# EAGLE board CT_schematic (EAGLE 7.6.0)

Size 100 x 80 mm. Coordinates in mm from the lower left corner, seen from the top.
Outline: 0,0 100,0 100,80 0,80 0,0
Copper layers (1*16): Top 0.035mm / dielectric 1.5mm / Bottom 0.035mm
Design rules "default": minimum track width 10mil, minimum drill 24mil, track to track 8mil, track to pad 8mil, pad to pad 8mil, via to via 8mil, smd to smd 8mil, copper to edge 40mil, drill to drill 8mil, minimum pad ring 10mil, minimum via ring 8mil, stop-mask expansion 4mil, vias tented up to drill 0mil, thermal gap 10mil

## Footprints (pad centres in the part's own frame; a part is rotated, then mirrored left to right if it is on the bottom)
C0603 = smd 0.8 x 0.8: 1 -0.762,0; 2 0.762,0
C0402 = smd 0.5 x 0.5: 1 -0.508,0; 2 0.508,0
C0805 = smd 1.2 x 1.3: 1 -1.016,0; 2 1.016,0
C1210 = smd 1.2 x 2.5: 1 -1.524,0; 2 1.524,0
R0603 = smd 0.8 x 0.8: 1 -0.762,0; 2 0.762,0
EXV-9H = smd 3.505 x 1.676: 1 -2.857,0; 2 2.857,0
L0603 = smd 0.8 x 0.8: 1 -0.762,0; 2 0.762,0
PJ-037B_PACKAGE = drill 3.7 square: 1 12,0 | drill 3.2 square: 2 6,0
LQFP176 = smd 0.3 x 1.2: 1 -10.75,-12.75; 2 -10.25,-12.75; 3 -9.75,-12.75; 4 -9.25,-12.75; 5 -8.75,-12.75; 6 -8.25,-12.75; 7 -7.75,-12.75; 8 -7.25,-12.75; 9 -6.75,-12.75; 10 -6.25,-12.75; 11 -5.75,-12.75; 12 -5.25,-12.75; 13 -4.75,-12.75; 14 -4.25,-12.75; 15 -3.75,-12.75; 16 -3.25,-12.75; 17 -2.75,-12.75; 18 -2.25,-12.75; 19 -1.75,-12.75; 20 -1.25,-12.75; 21 -0.75,-12.75; 22 -0.25,-12.75; 23 0.25,-12.75; 24 0.75,-12.75; 25 1.25,-12.75; 26 1.75,-12.75; 27 2.25,-12.75; 28 2.75,-12.75; 29 3.25,-12.75; 30 3.75,-12.75; 31 4.25,-12.75; 32 4.75,-12.75; 33 5.25,-12.75; 34 5.75,-12.75; 35 6.25,-12.75; 36 6.75,-12.75; 37 7.25,-12.75; 38 7.75,-12.75; 39 8.25,-12.75; 40 8.75,-12.75; 41 9.25,-12.75; 42 9.75,-12.75; 43 10.25,-12.75; 44 10.75,-12.75; 89 10.75,12.75; 90 10.25,12.75; 91 9.75,12.75; 92 9.25,12.75; 93 8.75,12.75; 94 8.25,12.75; 95 7.75,12.75; 96 7.25,12.75; 97 6.75,12.75; 98 6.25,12.75; 99 5.75,12.75; 100 5.25,12.75; 101 4.75,12.75; 102 4.25,12.75; 103 3.75,12.75; 104 3.25,12.75; 105 2.75,12.75; 106 2.25,12.75; 107 1.75,12.75; 108 1.25,12.75; 109 0.75,12.75; 110 0.25,12.75; 111 -0.25,12.75; 112 -0.75,12.75; 113 -1.25,12.75; 114 -1.75,12.75; 115 -2.25,12.75; 116 -2.75,12.75; 117 -3.25,12.75; 118 -3.75,12.75; 119 -4.25,12.75; 120 -4.75,12.75; 121 -5.25,12.75; 122 -5.75,12.75; 123 -6.25,12.75; 124 -6.75,12.75; 125 -7.25,12.75; 126 -7.75,12.75; 127 -8.25,12.75; 128 -8.75,12.75; 129 -9.25,12.75; 130 -9.75,12.75; 131 -10.25,12.75; 132 -10.75,12.75 | smd 1.2 x 0.3: 45 12.75,-10.75; 46 12.75,-10.25; 47 12.75,-9.75; 48 12.75,-9.25; 49 12.75,-8.75; 50 12.75,-8.25; 51 12.75,-7.75; 52 12.75,-7.25; 53 12.75,-6.75; 54 12.75,-6.25; 55 12.75,-5.75; 56 12.75,-5.25; 57 12.75,-4.75; 58 12.75,-4.25; 59 12.75,-3.75; 60 12.75,-3.25; 61 12.75,-2.75; 62 12.75,-2.25; 63 12.75,-1.75; 64 12.75,-1.25; 65 12.75,-0.75; 66 12.75,-0.25; 67 12.75,0.25; 68 12.75,0.75; 69 12.75,1.25; 70 12.75,1.75; 71 12.75,2.25; 72 12.75,2.75; 73 12.75,3.25; 74 12.75,3.75; 75 12.75,4.25; 76 12.75,4.75; 77 12.75,5.25; 78 12.75,5.75; 79 12.75,6.25; 80 12.75,6.75; 81 12.75,7.25; 82 12.75,7.75; 83 12.75,8.25; 84 12.75,8.75; 85 12.75,9.25; 86 12.75,9.75; 87 12.75,10.25; 88 12.75,10.75; 133 -12.75,10.75; 134 -12.75,10.25; 135 -12.75,9.75; 136 -12.75,9.25; 137 -12.75,8.75; 138 -12.75,8.25; 139 -12.75,7.75; 140 -12.75,7.25; 141 -12.75,6.75; 142 -12.75,6.25; 143 -12.75,5.75; 144 -12.75,5.25; 145 -12.75,4.75; 146 -12.75,4.25; 147 -12.75,3.75; 148 -12.75,3.25; 149 -12.75,2.75; 150 -12.75,2.25; 151 -12.75,1.75; 152 -12.75,1.25; 153 -12.75,0.75; 154 -12.75,0.25; 155 -12.75,-0.25; 156 -12.75,-0.75; 157 -12.75,-1.25; 158 -12.75,-1.75; 159 -12.75,-2.25; 160 -12.75,-2.75; 161 -12.75,-3.25; 162 -12.75,-3.75; 163 -12.75,-4.25; 164 -12.75,-4.75; 165 -12.75,-5.25; 166 -12.75,-5.75; 167 -12.75,-6.25; 168 -12.75,-6.75; 169 -12.75,-7.25; 170 -12.75,-7.75; 171 -12.75,-8.25; 172 -12.75,-8.75; 173 -12.75,-9.25; 174 -12.75,-9.75; 175 -12.75,-10.25; 176 -12.75,-10.75
SAMTEC_FTSH-105-01-L-DV-K = smd 0.762 x 2.794: 1 -2.54,-2.032; 2 -2.54,2.032; 3 -1.27,-2.032; 4 -1.27,2.032; 5 0,-2.032; 6 0,2.032; 7 1.27,-2.032; 8 1.27,2.032; 9 2.54,-2.032; 10 2.54,2.032
QFN-32 = smd 0.6 x 0.3: 1 -2.3,1.75; 2 -2.3,1.25; 3 -2.3,0.75; 4 -2.3,0.25; 5 -2.3,-0.25; 6 -2.3,-0.75; 7 -2.3,-1.25; 8 -2.3,-1.75; 17 2.3,-1.75; 18 2.3,-1.25; 19 2.3,-0.75; 20 2.3,-0.25; 21 2.3,0.25; 22 2.3,0.75; 23 2.3,1.25; 24 2.3,1.75 | smd 0.3 x 0.6: 9 -1.75,-2.3; 10 -1.25,-2.3; 11 -0.75,-2.3; 12 -0.25,-2.3; 13 0.25,-2.3; 14 0.75,-2.3; 15 1.25,-2.3; 16 1.75,-2.3; 25 1.75,2.3; 26 1.25,2.3; 27 0.75,2.3; 28 0.25,2.3; 29 -0.25,2.3; 30 -0.75,2.3; 31 -1.25,2.3; 32 -1.75,2.3 | smd 3.2 x 3.2: EXP 0,0
7498011122R = smd 0.71 x 2.29: 1 -3.545,-3.18; 2 -2.525,-3.18; 3 -1.505,-3.18; 4 -0.485,-3.18; 5 0.535,-3.18; 6 1.555,-3.18; 8 3.595,-3.18; 9 5.635,-3.18; 10 6.655,-3.18; 11 -6.605,-3.18; 12 -5.585,-3.18 | smd 1.4 x 2.54: 13 -8.51,10.2; 14 8.51,10.2 | hole 1.4: -3.5,0; 3.5,0
TDFN-8/6MM = smd 0.3 x 0.75: 1 0,0; 2 0.5,0; 3 1,0; 4 1.5,0; 5 1.5,3; 6 1,3; 7 0.5,3; 8 0,3
MOLEX_47219-2001 = smd 0.8 x 1.5: 1 3.2,-2.1; 2 2.1,-2.1; 3 1,-2.1; 4 -0.1,-2.1; 5 -1.2,-2.1; 6 -2.3,-2.1; 7 -3.4,-2.1; 8 -4.5,-2.1 | smd 1.5 x 2.05: G1 6.875,-4.7; G2 6.875,3.6; G3 -6.875,3.6; G4 -6.875,-4.7
LBGA-64 = smd 0.559 x 0.559: A1 -3.5,3.5; A2 -2.5,3.5; A3 -1.5,3.5; A4 -0.5,3.5; A5 0.5,3.5; A6 1.5,3.5; A7 2.5,3.5; A8 3.5,3.5; B1 -3.5,2.5; B2 -2.5,2.5; B3 -1.5,2.5; B4 -0.5,2.5; B5 0.5,2.5; B6 1.5,2.5; B7 2.5,2.5; B8 3.5,2.5; C1 -3.5,1.5; C2 -2.5,1.5; C3 -1.5,1.5; C4 -0.5,1.5; C5 0.5,1.5; C6 1.5,1.5; C7 2.5,1.5; C8 3.5,1.5; D1 -3.5,0.5; D2 -2.5,0.5; D3 -1.5,0.5; D4 -0.5,0.5; D5 0.5,0.5; D6 1.5,0.5; D7 2.5,0.5; D8 3.5,0.5; E1 -3.5,-0.5; E2 -2.5,-0.5; E3 -1.5,-0.5; E4 -0.5,-0.5; E5 0.5,-0.5; E6 1.5,-0.5; E7 2.5,-0.5; E8 3.5,-0.5; F1 -3.5,-1.5; F2 -2.5,-1.5; F3 -1.5,-1.5; F4 -0.5,-1.5; F5 0.5,-1.5; F6 1.5,-1.5; F7 2.5,-1.5; F8 3.5,-1.5; G1 -3.5,-2.5; G2 -2.5,-2.5; G3 -1.5,-2.5; G4 -0.5,-2.5; G5 0.5,-2.5; G6 1.5,-2.5; G7 2.5,-2.5; G8 3.5,-2.5; H1 -3.5,-3.5; H2 -2.5,-3.5; H3 -1.5,-3.5; H4 -0.5,-3.5; H5 0.5,-3.5; H6 1.5,-3.5; H7 2.5,-3.5; H8 3.5,-3.5
ABS07-32.768KHZ-7-T = smd 1.1 x 2.4: 1 -2.5,0; 2 0,0
ABLS-25.000MHZ-B2F-T = smd 5.6 x 2.8: 1 -3.81,0; 2 5.69,0
ASFL1 = smd 1.7 x 1.5: 1 -1.27,-1.1; 2 1.27,-1.1; 3 1.27,1.1; 4 -1.27,1.1
WSON-8 = smd 0.3 x 0.6: 1 -0.75,0; 2 0.05,0; 3 0.85,0; 4 1.65,0; 5 1.65,3.8; 6 0.85,3.8; 7 0.05,3.8; 8 -0.75,3.8 | smd 3 x 2.6: PAD 0.45,1.9
QFN-38_UHF = smd 0.75 x 0.3: 1 -2.4,2.75; 2 -2.4,2.25; 3 -2.4,1.75; 4 -2.4,1.25; 6 -2.4,0.25; 7 -2.4,-0.25; 8 -2.4,-0.75; 9 -2.4,-1.25; 10 -2.4,-1.75; 11 -2.4,-2.25; 12 -2.4,-2.75; 20 2.4,-2.75; 21 2.4,-2.25; 22 2.4,-1.75; 23 2.4,-1.25; 24 2.4,-0.75; 25 2.4,-0.25; 26 2.4,0.25; 27 2.4,0.75; 28 2.4,1.25; 29 2.4,1.75; 30 2.4,2.25; 31 2.4,2.75 | smd 0.758 x 0.3: 5 -2.4,0.75 | smd 0.3 x 0.75: 13 -1.5,-3.4; 14 -1,-3.4; 15 -0.5,-3.4; 16 0,-3.4; 17 0.5,-3.4; 18 1,-3.4; 19 1.5,-3.4; 32 1.5,3.4; 33 1,3.4; 34 0.5,3.4; 35 0,3.4; 36 -0.5,3.4; 37 -1,3.4; 38 -1.5,3.4 | smd 3.2 x 5.2: 39 0,0
IRF8306MTRPBF = smd 0.9 x 1.85: 1 0,0; 2 0,-2.35; 6 6.4,0; 7 6.4,-2.35 | smd 0.75 x 0.75: 3 1.75,-1.175 | smd 1.45 x 0.87: 4 3.5,-0.565; 5 3.5,-1.785
SW_4-1437565-2 = smd 1.4 x 2.1: 1 -2.23,4.55; 2 -2.23,-4.55; 3 2.23,4.55; 4 2.23,-4.55
LGM67K-G1J2-24-Z = smd 0.8 x 1.4: A -2,0; C 0,0
NC7SZ125M5X = smd 1.3 x 0.7: 1 -1.3,0.95; 2 -1.3,0; 3 -1.3,-0.95; 4 1.3,-0.95; 5 1.3,0.95

## Placement (x,y rotation side)
C1  1e-06  [C0603]  -96.52,85.09 0 top  (outside the outline)
C2  1e-07  [C0603]  -15.24,90.17 0 top  (outside the outline)
C3  1e-07  [C0603]  -19.05,90.17 0 top  (outside the outline)
C4  1e-07  [C0603]  -22.86,90.17 0 top  (outside the outline)
C5  1e-07  [C0603]  -26.67,90.17 0 top  (outside the outline)
C6  1e-07  [C0603]  -30.48,90.17 0 top  (outside the outline)
C7  1e-07  [C0603]  -34.29,90.17 0 top  (outside the outline)
C8  1e-07  [C0603]  -38.1,90.17 0 top  (outside the outline)
C9  1e-07  [C0603]  -41.91,90.17 0 top  (outside the outline)
C10  1e-07  [C0603]  -45.72,90.17 0 top  (outside the outline)
C11  1e-07  [C0603]  -49.53,90.17 0 top  (outside the outline)
C12  1e-07  [C0603]  -53.34,90.17 0 top  (outside the outline)
C13  1e-07  [C0603]  -57.15,90.17 0 top  (outside the outline)
C14  1e-07  [C0603]  -60.96,90.17 0 top  (outside the outline)
C15  1e-07  [C0603]  -64.77,90.17 0 top  (outside the outline)
C16  1e-07  [C0603]  -68.58,90.17 0 top  (outside the outline)
C17  1e-07  [C0603]  -72.39,90.17 0 top  (outside the outline)
C18  4.7e-06  [C0603]  -85.09,85.09 0 top  (outside the outline)
C19  1e-08  [C0603]  -76.2,90.17 0 top  (outside the outline)
C20  1e-06  [C0603]  -80.01,90.17 0 top  (outside the outline)
C21  1e-07  [C0402]  -46.99,100.33 0 top  (outside the outline)
C22  1e-07  [C0402]  -50.8,100.33 0 top  (outside the outline)
C23  1e-11  [C0402]  -54.61,100.33 0 top  (outside the outline)
C24  1e-11  [C0402]  -58.42,100.33 0 top  (outside the outline)
C25  1e-11  [C0402]  -62.23,100.33 0 top  (outside the outline)
C26  1e-11  [C0402]  -66.04,100.33 0 top  (outside the outline)
C27  1e-07  [C0402]  -69.85,100.33 0 top  (outside the outline)
C28  1e-07  [C0402]  -73.66,100.33 0 top  (outside the outline)
C29  1e-07  [C0402]  -77.47,100.33 0 top  (outside the outline)
C30  2.2e-06  [C0603]  -88.9,85.09 0 top  (outside the outline)
C31  1e-07  [C0402]  -81.28,100.33 0 top  (outside the outline)
C32  1e-07  [C0402]  -85.09,100.33 0 top  (outside the outline)
C33  1e-05  [C0805]  -53.34,73.66 0 top  (outside the outline)
C34  1e-07  [C0402]  -88.9,100.33 0 top  (outside the outline)
C35  2.2e-11  [C0402]  -39.37,100.33 0 top  (outside the outline)
C36  2.2e-11  [C0402]  -43.18,100.33 0 top  (outside the outline)
C37  1e-08  [C0402]  -92.71,100.33 0 top  (outside the outline)
C38  1e-07  [C0402]  -96.52,100.33 0 top  (outside the outline)
C39  1e-05  [C0805]  -58.42,73.66 0 top  (outside the outline)
C40  1e-08  [C0402]  -15.24,105.41 0 top  (outside the outline)
C41  1e-08  [C0402]  -19.05,105.41 0 top  (outside the outline)
C42  1e-08  [C0402]  -22.86,105.41 0 top  (outside the outline)
C43  1e-08  [C0402]  -26.67,105.41 0 top  (outside the outline)
C44  1e-05  [C1210]  -90.17,67.31 0 top  (outside the outline)
C45  1e-05  [C0805]  -63.5,73.66 0 top  (outside the outline)
C46  1e-08  [C0402]  -30.48,105.41 0 top  (outside the outline)
C47  1e-05  [C1210]  -96.52,67.31 0 top  (outside the outline)
C48  1e-05  [C1210]  -16.51,73.66 0 top  (outside the outline)
C49  1e-08  [C0402]  -34.29,105.41 0 top  (outside the outline)
C50  1e-05  [C1210]  -22.86,73.66 0 top  (outside the outline)
C51  1e-05  [C0805]  -68.58,73.66 0 top  (outside the outline)
C52  1e-07  [C0402]  -38.1,105.41 0 top  (outside the outline)
C53  2.2e-06  [C0603]  -92.71,85.09 0 top  (outside the outline)
C54  2.45e-08  [R0603]  -55.88,80.01 0 top  (outside the outline)
C55  2.8258362168397e-09  [R0603]  -78.74,73.66 0 top  (outside the outline)
C56  7.105e-09  [R0603]  -91.44,73.66 0 top  (outside the outline)
C57  0.0001  [EXV-9H]  -64.77,58.42 0 top  (outside the outline)
C58  0.0001  [EXV-9H]  -76.2,58.42 0 top  (outside the outline)
C59  1e-08  [C0402]  -41.91,105.41 0 top  (outside the outline)
C60  1e-08  [C0402]  -45.72,105.41 0 top  (outside the outline)
C61  1e-08  [C0402]  -49.53,105.41 0 top  (outside the outline)
C62  1e-08  [C0402]  -53.34,105.41 0 top  (outside the outline)
F1  240.0  [L0603]  -83.82,90.17 0 top  (outside the outline)
I1  97.0  [R0603]  -87.63,90.17 0 top  (outside the outline)
J1  PJ-037B  [PJ-037B_PACKAGE]  -57.15,35.56 0 top  (outside the outline)
R2  1000.0  [R0603]  -91.44,90.17 0 top  (outside the outline)
R7  4700.0  [R0603]  -95.25,90.17 0 top  (outside the outline)
R8  4700.0  [R0603]  -15.24,95.25 0 top  (outside the outline)
R9  4700.0  [R0603]  -19.05,95.25 0 top  (outside the outline)
R10  2200.0  [R0603]  -22.86,95.25 0 top  (outside the outline)
R12  2200.0  [R0603]  -26.67,95.25 0 top  (outside the outline)
R14  2200.0  [R0603]  -30.48,95.25 0 top  (outside the outline)
R16  2200.0  [R0603]  -34.29,95.25 0 top  (outside the outline)
R18  10000.0  [R0603]  -60.96,80.01 0 top  (outside the outline)
R19  10000.0  [R0603]  -66.04,80.01 0 top  (outside the outline)
R20  10000.0  [R0603]  -71.12,80.01 0 top  (outside the outline)
R21  10000.0  [R0603]  -76.2,80.01 0 top  (outside the outline)
R22  10000.0  [R0603]  -81.28,80.01 0 top  (outside the outline)
R23  10000.0  [R0603]  -86.36,80.01 0 top  (outside the outline)
R24  10000.0  [R0603]  -91.44,80.01 0 top  (outside the outline)
R25  10000.0  [R0603]  -96.52,80.01 0 top  (outside the outline)
R26  5.0  [R0603]  -38.1,95.25 0 top  (outside the outline)
R27  0.1  [R0603]  -41.91,95.25 0 top  (outside the outline)
R28  0.1  [R0603]  -45.72,95.25 0 top  (outside the outline)
R29  200.0  [R0603]  -49.53,95.25 0 top  (outside the outline)
R30  220.0  [R0603]  -53.34,95.25 0 top  (outside the outline)
R31  6490.0  [R0603]  -57.15,95.25 0 top  (outside the outline)
R32  4700.0  [R0603]  -60.96,95.25 0 top  (outside the outline)
R33  4700.0  [R0603]  -64.77,95.25 0 top  (outside the outline)
R34  4700.0  [R0603]  -68.58,95.25 0 top  (outside the outline)
R35  4700.0  [R0603]  -72.39,95.25 0 top  (outside the outline)
R36  1000.0  [R0603]  -76.2,95.25 0 top  (outside the outline)
R37  4700.0  [R0603]  -80.01,95.25 0 top  (outside the outline)
R38  1000.0  [R0603]  -83.82,95.25 0 top  (outside the outline)
R39  1000.0  [R0603]  -87.63,95.25 0 top  (outside the outline)
R40  1000.0  [R0603]  -91.44,95.25 0 top  (outside the outline)
R41  4700.0  [R0603]  -95.25,95.25 0 top  (outside the outline)
R42  100000.0  [R0603]  -96.52,73.66 0 top  (outside the outline)
R43  100000.0  [R0603]  -15.24,80.01 0 top  (outside the outline)
R44  100000.0  [R0603]  -20.32,80.01 0 top  (outside the outline)
R45  100000.0  [R0603]  -25.4,80.01 0 top  (outside the outline)
R46  100000.0  [R0603]  -30.48,80.01 0 top  (outside the outline)
R47  100000.0  [R0603]  -35.56,80.01 0 top  (outside the outline)
R48  10000.0  [R0603]  -15.24,85.09 0 top  (outside the outline)
R49  10000.0  [R0603]  -20.32,85.09 0 top  (outside the outline)
R50  10000.0  [R0603]  -25.4,85.09 0 top  (outside the outline)
R51  10000.0  [R0603]  -30.48,85.09 0 top  (outside the outline)
R52  10000.0  [R0603]  -35.56,85.09 0 top  (outside the outline)
R53  100000.0  [R0603]  -40.64,80.01 0 top  (outside the outline)
R54  200.0  [R0603]  -15.24,100.33 0 top  (outside the outline)
R55  1000.0  [R0603]  -19.05,100.33 0 top  (outside the outline)
R56  100000.0  [R0603]  -45.72,80.01 0 top  (outside the outline)
R57  2231.0  [R0603]  -22.86,100.33 0 top  (outside the outline)
R58  1000.0  [R0603]  -26.67,100.33 0 top  (outside the outline)
R59  100000.0  [R0603]  -50.8,80.01 0 top  (outside the outline)
R60  200.0  [R0603]  -30.48,100.33 0 top  (outside the outline)
R61  1000.0  [R0603]  -34.29,100.33 0 top  (outside the outline)
R62  10000.0  [R0603]  -40.64,85.09 0 top  (outside the outline)
R63  75000.0  [R0603]  -45.72,85.09 0 top  (outside the outline)
R64  10000.0  [R0603]  -50.8,85.09 0 top  (outside the outline)
R65  10000.0  [R0603]  -55.88,85.09 0 top  (outside the outline)
R66  95300.0  [R0603]  -60.96,85.09 0 top  (outside the outline)
R67  95300.0  [R0603]  -66.04,85.09 0 top  (outside the outline)
R68  10000.0  [R0603]  -71.12,85.09 0 top  (outside the outline)
R69  10000.0  [R0603]  -76.2,85.09 0 top  (outside the outline)
R70  10000.0  [R0603]  -81.28,85.09 0 top  (outside the outline)
R71  104236.36363636  [R0603]  -86.36,73.66 0 top  (outside the outline)
U1  STM32F427IGT6  [LQFP176]  -45.72,13.97 0 top  (outside the outline)
U2  FTSH-105-01-L-DV-K  [SAMTEC_FTSH-105-01-L-DV-K]  -35.56,36.83 0 top  (outside the outline)
U3  KSZ8081RNBIA-TR  [QFN-32]  -90.17,34.29 0 top  (outside the outline)
U4  7498011122R  [7498011122R]  -22.86,7.62 0 top  (outside the outline)
U5  24AA02T-I/MNY  [TDFN-8/6MM]  -24.13,48.26 0 top  (outside the outline)
U6  0472192001  [MOLEX_47219-2001]  -69.85,8.89 0 top  (outside the outline)
U7  mt28ew256aba1HPC-0SIT  [LBGA-64]  -86.36,7.62 0 top  (outside the outline)
U8  ABS07-32.768KHZ-7-T  [ABS07-32.768KHZ-7-T]  -69.85,67.31 0 top  (outside the outline)
U9  ABLS-25.000MHZ-B2F-T  [ABLS-25.000MHZ-B2F-T]  -26.67,67.31 0 top  (outside the outline)
U10  ABLS-25.000MHZ-B2F-T  [ABLS-25.000MHZ-B2F-T]  -46.99,67.31 0 top  (outside the outline)
U11  ASFL1-50MHZ-NCS  [ASFL1]  -46.99,58.42 0 top  (outside the outline)
U12  LP3878SDX-ADJ/NOPB  [WSON-8]  -74.93,46.99 0 top  (outside the outline)
U13  LP3878SDX-ADJ/NOPB  [WSON-8]  -95.25,46.99 0 top  (outside the outline)
U14  LP3878SDX-ADJ/NOPB  [WSON-8]  -30.48,57.15 0 top  (outside the outline)
U15  LTC2928CUHF#PBF  [QFN-38_UHF]  -54.61,58.42 0 top  (outside the outline)
U16  IRF8306MTRPbF  [IRF8306MTRPBF]  -40.64,49.53 0 top  (outside the outline)
U17  IRF8306MTRPbF  [IRF8306MTRPBF]  -55.88,49.53 0 top  (outside the outline)
U18  4-1437565-2  [SW_4-1437565-2]  -73.66,34.29 0 top  (outside the outline)
U19  Q65110A2395  [LGM67K-G1J2-24-Z]  -78.74,67.31 0 top  (outside the outline)
U20  nc7sz125m5x  [NC7SZ125M5X]  -27.94,73.66 0 top  (outside the outline)
U21  nc7sz125m5x  [NC7SZ125M5X]  -34.29,73.66 0 top  (outside the outline)
U22  nc7sz125m5x  [NC7SZ125M5X]  -40.64,73.66 0 top  (outside the outline)
U23  nc7sz125m5x  [NC7SZ125M5X]  -46.99,73.66 0 top  (outside the outline)

## Library data of the parts
C1-C62 F1 I1 J1 R2 R7-R10 R12 R14 R16 R18-R71 U1-U23 = circuit_tree

## Nets
CLK_CRYSTAL_U1_9: C23.1 U1.9 U8.1
CLK_CRYSTAL_U1_10: C24.1 U1.10 U8.2
CLK_CRYSTAL_U1_29: C25.1 U1.29 U9.1
CLK_CRYSTAL_U1_30: C26.1 U1.30 U9.2
CLK_CRYSTAL_U3_8: C35.1 U3.8 U10.2
CLK_CRYSTAL_U3_9: C36.1 U3.9 U10.1
CLK_U1_41: U1.41 U11.3
GND: C1.2 C2.2 C3.2 C4.2 C5.2 C6.2 C7.2 C8.2 C9.2 C10.2 C11.2 C12.2 C13.2 C14.2 C15.2 C16.2 C17.2 C18.2 C19.2 C20.2 C21.2 C22.2 C23.2 C24.2 C25.2 C26.2 C27.2 C28.2 C29.2 C30.2 C31.2 C32.2 C33.2 C34.2 C35.2 C36.2 C37.2 C38.2 C39.2 C40.2 C41.2 C42.2 C43.2 C44.2 C45.2 C46.2 C47.2 C48.2 C49.2 C50.2 C51.2 C52.2 C53.2 C54.2 C55.2 C56.2 C57.2 C58.2 C59.2 C60.2 C61.2 C62.2 J1.2 R2.2 R20.2 R25.2 R26.2 R27.2 R28.2 R31.2 R33.2 R36.2 R38.2 R39.2 R40.2 R55.2 R58.2 R61.2 R63.2 R66.2 R67.2 R68.2 R69.2 R70.2 U1.14 U1.22 U1.37 U1.61 U1.71 U1.90 U1.102 U1.113 U1.126 U1.135 U1.148 U1.158 U2.3 U2.5 U3.1 U3.EXP U4.1 U4.10 U5.4 U5.7 U6.6 U6.G1 U6.G2 U6.G3 U6.G4 U7.E8 U7.H2 U7.H7 U11.2 U12.3 U12.PAD U13.3 U13.PAD U14.3 U14.PAD U15.8 U15.9 U15.10 U15.12 U15.13 U15.24 U15.25 U15.30 U15.32 U15.39 U19.C U20.2 U20.3 U21.1 U21.3 U22.1 U22.3 U23.1 U23.3
NET_U1_31: R9.1 U1.31 U23.4
NET_U1_33: R14.1 U1.33 U3.12
NET_U1_39: C19.1 C20.1 F1.1 U1.38 U1.39
NET_U1_42: R16.1 U1.42 U3.11
NET_U1_48: R21.1 U1.48
NET_U1_58: R20.1 U1.58
NET_U1_125: C22.1 U1.125
NET_U1_164: R10.1 U1.164 U5.6
NET_U1_165: R12.1 U1.165 U5.5
NET_U1_166: R19.1 U1.166
NET_U1_171: R18.1 U1.171
NET_U1_175: U19.A
NET_U1_176: U18.3 U18.4
NET_U2_9: R26.1 U2.9
NET_U3_2: C30.1 C31.1 U3.2
NET_U3_3: C32.1 I1.1 U3.3
NET_U3_10: R31.1 U3.10
NET_U3_13: R34.1 U3.13
NET_U3_14: R35.1 U3.14
NET_U3_19: R33.1 U3.19
NET_U3_20: R39.1 U3.20
NET_U3_21: R32.1 U3.21
NET_U3_28: R37.1 U3.28
NET_U3_29: R38.1 U3.29
NET_U3_31: R40.1 U3.31
NET_U3_32: R7.1 U3.32 U21.4
NET_U4_1: U3.7 U4.1
NET_U4_2: C28.1 U4.2
NET_U4_3: U3.6 U4.3
NET_U4_4: U3.5 U4.4
NET_U4_5: C29.1 U4.5
NET_U4_6: U3.4 U4.6
NET_U4_8: R28.1 U4.8
NET_U4_9: R29.1 U4.9
NET_U4_12: R30.1 U4.12
NET_U4_13: R27.1 U4.13 U4.14
NET_U4_30: R29.2
NET_U4_31: R30.2
NET_U7_B4: R51.1 U7.B4
NET_U7_B5: R8.1 U7.B5 U22.4
NET_U12_1: C43.1 U12.1
NET_U12_6: R54.2 R55.1 U12.6
NET_U12_8: R53.1 U12.8
NET_U13_1: C46.1 U13.1
NET_U13_6: R57.2 R58.1 U13.6
NET_U13_8: R56.1 U13.8
NET_U14_1: C49.1 U14.1
NET_U14_6: R60.2 R61.1 U14.6
NET_U14_8: R59.1 U14.8
NET_U15_3: R69.1 U15.3
NET_U15_6: R66.1 U15.6
NET_U15_7: R67.1 U15.7
NET_U15_16: R68.1 R71.1 U15.16
NET_U15_18: R65.1 U15.18
NET_U15_19: R64.1 U15.19 U15.20
NET_U15_21: R62.1 R63.1 U15.21 U20.4 U21.2 U22.2 U23.2
NET_U15_22: C52.1 R62.2 R64.2 R65.2 U15.11 U15.22
NET_U15_26: C55.1 U15.26
NET_U15_27: C54.1 U15.27
NET_U15_28: C56.1 U15.28
NET_U15_38: R70.1 U15.38
NET_U16_3: U15.2 U16.3
NET_U17_3: U15.37 U17.3
NET_U18_1: R2.1 U18.1 U18.2
PROC_ETH_CRS_DV: U1.53 U3.18
PROC_ETH_RXD0: R41.1 U1.54 U3.16
PROC_ETH_RXD1: R36.1 U1.55 U3.15
PROC_ETH_TX_EN: U1.80 U3.23
PROC_ETH_TXD0: U1.92 U3.24
PROC_ETH_TXD1: U1.93 U3.25
PROC_FMC_A0: U1.16 U7.E2
PROC_FMC_A1: U1.17 U7.D2
PROC_FMC_A2: U1.18 U7.C2
PROC_FMC_A3: U1.19 U7.A2
PROC_FMC_A4: U1.20 U7.B2
PROC_FMC_A5: U1.21 U7.D3
PROC_FMC_A6: U1.60 U7.C3
PROC_FMC_A7: U1.63 U7.A3
PROC_FMC_A8: U1.64 U7.B6
PROC_FMC_A9: U1.65 U7.A6
PROC_FMC_A10: U1.66 U7.C6
PROC_FMC_A11: U1.67 U7.D6
PROC_FMC_A12: U1.106 U7.B7
PROC_FMC_A13: U1.107 U7.A7
PROC_FMC_A14: U1.108 U7.C7
PROC_FMC_A15: U1.109 U7.D7
PROC_FMC_A16: U1.99 U7.E7
PROC_FMC_A17: U1.100 U7.B3
PROC_FMC_A18: U1.101 U7.C4
PROC_FMC_A19: U1.2 U7.D5
PROC_FMC_A20: U1.3 U7.D4
PROC_FMC_A21: U1.4 U7.C5
PROC_FMC_A22: U1.5 U7.B8
PROC_FMC_A23: U1.1 U7.C8
PROC_FMC_D0: U1.104 U7.E3
PROC_FMC_D1: U1.105 U7.H3
PROC_FMC_D2: U1.142 U7.E4
PROC_FMC_D3: U1.143 U7.H4
PROC_FMC_D4: U1.68 U7.H5
PROC_FMC_D5: U1.69 U7.E5
PROC_FMC_D6: U1.70 U7.H6
PROC_FMC_D7: U1.73 U7.E6
PROC_FMC_D8: U1.74 U7.F3
PROC_FMC_D9: U1.75 U7.G3
PROC_FMC_D10: U1.76 U7.F4
PROC_FMC_D11: U1.77 U7.G4
PROC_FMC_D12: U1.78 U7.F5
PROC_FMC_D13: U1.96 U7.G6
PROC_FMC_D14: U1.97 U7.F6
PROC_FMC_D15: U1.98 U7.G7
PROC_FMC_NBL0: R52.1 U1.169 U7.F7
PROC_FMC_NE2: R48.1 U1.152 U7.F2
PROC_FMC_NOE: R49.1 U1.146 U7.G2
PROC_FMC_NWAIT: U1.150 U7.A4
PROC_FMC_NWE: R50.1 U1.147 U7.A5
PROC_SDIO_CK: R43.1 U1.141 U6.5
PROC_SDIO_CMD: R42.1 U1.144 U6.3
PROC_SDIO_D0: R44.1 U1.117 U6.7
PROC_SDIO_D1: R45.1 U1.118 U6.8
PROC_SDIO_D2: R46.1 U1.139 U6.1
PROC_SDIO_D3: R47.1 U1.140 U6.2
PROC_SYS_JTCK_SWCLK: R25.1 U1.137 U2.4
PROC_SYS_JTDI: R23.1 U1.138 U2.8
PROC_SYS_JTDO_SWO: U1.161 U2.6
PROC_SYS_JTMS_SWDIO: R24.1 U1.124 U2.2
RST_OUT_U2_JTAG_RST_B: R22.1 U2.10 U20.1
VCC_12V8: C53.1 C57.1 C58.1 J1.1 R71.2 U15.23 U16.1 U16.2 U16.6 U16.7 U17.1 U17.2 U17.6 U17.7
VCC_S1_12V8: C44.1 C47.1 R53.2 R56.2 U12.4 U13.4 U16.4 U16.5
VCC_S2_12V8: C50.1 R59.2 U14.4 U17.4 U17.5
VCC_TIER1_1V2: C21.1 C45.1 R54.1 U1.81 U12.5
VCC_TIER1_3V3: C1.1 C2.1 C3.1 C4.1 C5.1 C6.1 C7.1 C8.1 C9.1 C10.1 C11.1 C12.1 C13.1 C14.1 C15.1 C16.1 C17.1 C18.1 C27.1 C33.1 C34.1 C37.1 C38.1 C39.1 C40.1 C41.1 C42.1 C48.1 C59.1 C60.1 C61.1 C62.1 F1.2 I1.2 R7.2 R8.2 R9.2 R10.2 R12.2 R14.2 R16.2 R18.2 R19.2 R21.2 R22.2 R23.2 R24.2 R32.2 R34.2 R35.2 R37.2 R41.2 R42.2 R43.2 R44.2 R45.2 R46.2 R47.2 R48.2 R49.2 R50.2 R51.2 R52.2 R57.1 U1.6 U1.15 U1.23 U1.36 U1.49 U1.62 U1.72 U1.82 U1.91 U1.103 U1.114 U1.127 U1.136 U1.149 U1.159 U1.172 U2.1 U3.17 U5.8 U6.4 U7.D8 U7.F1 U7.G5 U11.4 U13.5 U20.5 U21.5 U22.5 U23.5
VCC_TIER2_1V2: C51.1 R60.1 U14.5

## Tracks (layer width: path | path; a pad name or v marks a point on that pad's centre or on a via)
CLK_CRYSTAL_U1_9  (2 unrouted)
CLK_CRYSTAL_U1_10  (2 unrouted)
CLK_CRYSTAL_U1_29  (2 unrouted)
CLK_CRYSTAL_U1_30  (2 unrouted)
CLK_CRYSTAL_U3_8  (2 unrouted)
CLK_CRYSTAL_U3_9  (2 unrouted)
CLK_U1_41  (1 unrouted)
GND  (137 unrouted)
NET_U1_31  (2 unrouted)
NET_U1_33  (2 unrouted)
NET_U1_39  (4 unrouted)
NET_U1_42  (2 unrouted)
NET_U1_48  (1 unrouted)
NET_U1_58  (1 unrouted)
NET_U1_125  (1 unrouted)
NET_U1_164  (2 unrouted)
NET_U1_165  (2 unrouted)
NET_U1_166  (1 unrouted)
NET_U1_171  (1 unrouted)
NET_U1_176  (1 unrouted)
NET_U2_9  (1 unrouted)
NET_U3_2  (2 unrouted)
NET_U3_3  (2 unrouted)
NET_U3_10  (1 unrouted)
NET_U3_13  (1 unrouted)
NET_U3_14  (1 unrouted)
NET_U3_19  (1 unrouted)
NET_U3_20  (1 unrouted)
NET_U3_21  (1 unrouted)
NET_U3_28  (1 unrouted)
NET_U3_29  (1 unrouted)
NET_U3_31  (1 unrouted)
NET_U3_32  (2 unrouted)
NET_U4_1  (1 unrouted)
NET_U4_2  (1 unrouted)
NET_U4_3  (1 unrouted)
NET_U4_4  (1 unrouted)
NET_U4_5  (1 unrouted)
NET_U4_6  (1 unrouted)
NET_U4_8  (1 unrouted)
NET_U4_9  (1 unrouted)
NET_U4_12  (1 unrouted)
NET_U4_13  (2 unrouted)
NET_U7_B4  (1 unrouted)
NET_U7_B5  (2 unrouted)
NET_U12_1  (1 unrouted)
NET_U12_6  (2 unrouted)
NET_U12_8  (1 unrouted)
NET_U13_1  (1 unrouted)
NET_U13_6  (2 unrouted)
NET_U13_8  (1 unrouted)
NET_U14_1  (1 unrouted)
NET_U14_6  (2 unrouted)
NET_U14_8  (1 unrouted)
NET_U15_3  (1 unrouted)
NET_U15_6  (1 unrouted)
NET_U15_7  (1 unrouted)
NET_U15_16  (2 unrouted)
NET_U15_18  (1 unrouted)
NET_U15_19  (2 unrouted)
NET_U15_21  (6 unrouted)
NET_U15_22  (5 unrouted)
NET_U15_26  (1 unrouted)
NET_U15_27  (1 unrouted)
NET_U15_28  (1 unrouted)
NET_U15_38  (1 unrouted)
NET_U16_3  (1 unrouted)
NET_U17_3  (1 unrouted)
NET_U18_1  (2 unrouted)
PROC_ETH_CRS_DV  (1 unrouted)
PROC_ETH_RXD0  (2 unrouted)
PROC_ETH_RXD1  (2 unrouted)
PROC_ETH_TX_EN  (1 unrouted)
PROC_ETH_TXD0  (1 unrouted)
PROC_ETH_TXD1  (1 unrouted)
PROC_FMC_A0  (1 unrouted)
PROC_FMC_A1  (1 unrouted)
PROC_FMC_A2  (1 unrouted)
PROC_FMC_A3  (1 unrouted)
PROC_FMC_A4  (1 unrouted)
PROC_FMC_A5  (1 unrouted)
PROC_FMC_A6  (1 unrouted)
PROC_FMC_A7  (1 unrouted)
PROC_FMC_A8  (1 unrouted)
PROC_FMC_A9  (1 unrouted)
PROC_FMC_A10  (1 unrouted)
PROC_FMC_A11  (1 unrouted)
PROC_FMC_A12  (1 unrouted)
PROC_FMC_A13  (1 unrouted)
PROC_FMC_A14  (1 unrouted)
PROC_FMC_A15  (1 unrouted)
PROC_FMC_A16  (1 unrouted)
PROC_FMC_A17  (1 unrouted)
PROC_FMC_A18  (1 unrouted)
PROC_FMC_A19  (1 unrouted)
PROC_FMC_A20  (1 unrouted)
PROC_FMC_A21  (1 unrouted)
PROC_FMC_A22  (1 unrouted)
PROC_FMC_A23  (1 unrouted)
PROC_FMC_D0  (1 unrouted)
PROC_FMC_D1  (1 unrouted)
PROC_FMC_D2  (1 unrouted)
PROC_FMC_D3  (1 unrouted)
PROC_FMC_D4  (1 unrouted)
PROC_FMC_D5  (1 unrouted)
PROC_FMC_D6  (1 unrouted)
PROC_FMC_D7  (1 unrouted)
PROC_FMC_D8  (1 unrouted)
PROC_FMC_D9  (1 unrouted)
PROC_FMC_D10  (1 unrouted)
PROC_FMC_D11  (1 unrouted)
PROC_FMC_D12  (1 unrouted)
PROC_FMC_D13  (1 unrouted)
PROC_FMC_D14  (1 unrouted)
PROC_FMC_D15  (1 unrouted)
PROC_FMC_NBL0  (2 unrouted)
PROC_FMC_NE2  (2 unrouted)
PROC_FMC_NOE  (2 unrouted)
PROC_FMC_NWAIT  (1 unrouted)
PROC_FMC_NWE  (2 unrouted)
PROC_SDIO_CK  (2 unrouted)
PROC_SDIO_CMD  (2 unrouted)
PROC_SDIO_D0  (2 unrouted)
PROC_SDIO_D1  (2 unrouted)
PROC_SDIO_D2  (2 unrouted)
PROC_SDIO_D3  (2 unrouted)
PROC_SYS_JTCK_SWCLK  (2 unrouted)
PROC_SYS_JTDI  (2 unrouted)
PROC_SYS_JTDO_SWO  (1 unrouted)
PROC_SYS_JTMS_SWDIO  (2 unrouted)
RST_OUT_U2_JTAG_RST_B  (2 unrouted)
VCC_12V8  (13 unrouted)
VCC_S1_12V8  (7 unrouted)
VCC_S2_12V8  (4 unrouted)
VCC_TIER1_1V2  (4 unrouted)
VCC_TIER1_3V3  (92 unrouted)
VCC_TIER2_1V2  (2 unrouted)